# Altium PCB STAC-v1-pcb.PcbDoc
Units mil, origin at the board's own origin, x right, y up, seen from the top; angles counter-clockwise.
Board outline 6000 x 4000 mil, 2 copper layers (Top Layer, Bottom Layer); 170 components, 130 nets, 686 pads, 0 vias.
Unrouted connection lines stored in the file: 502.
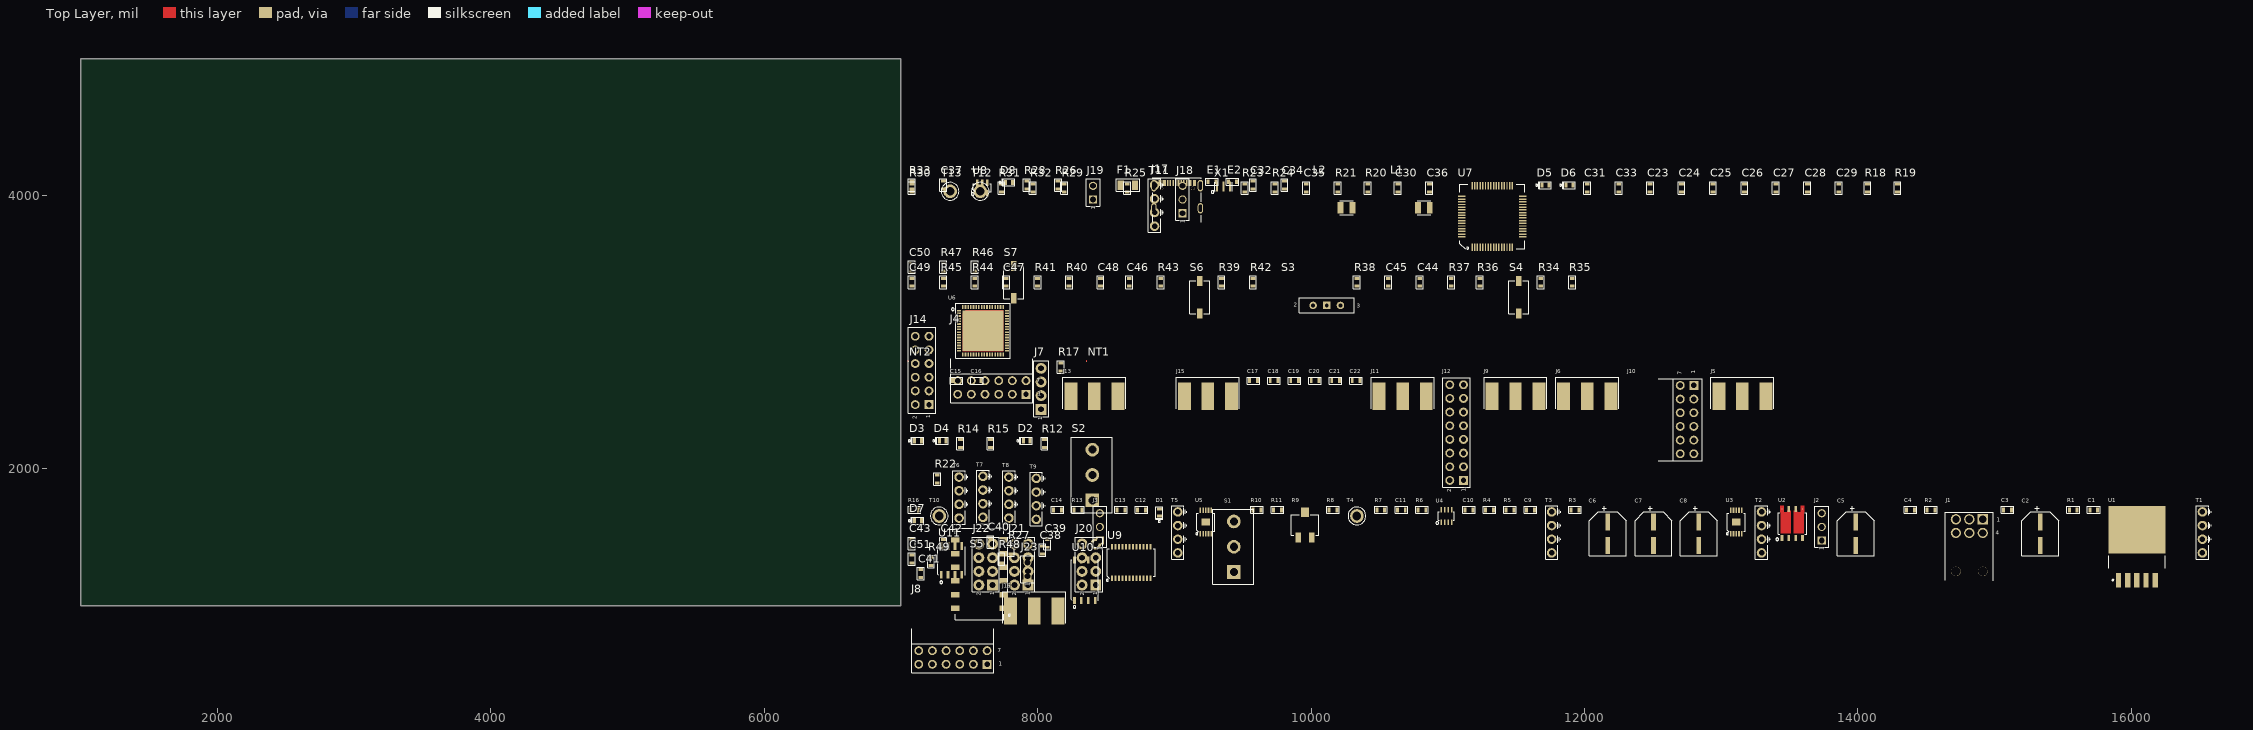
[diagram p0: Top Layer view]
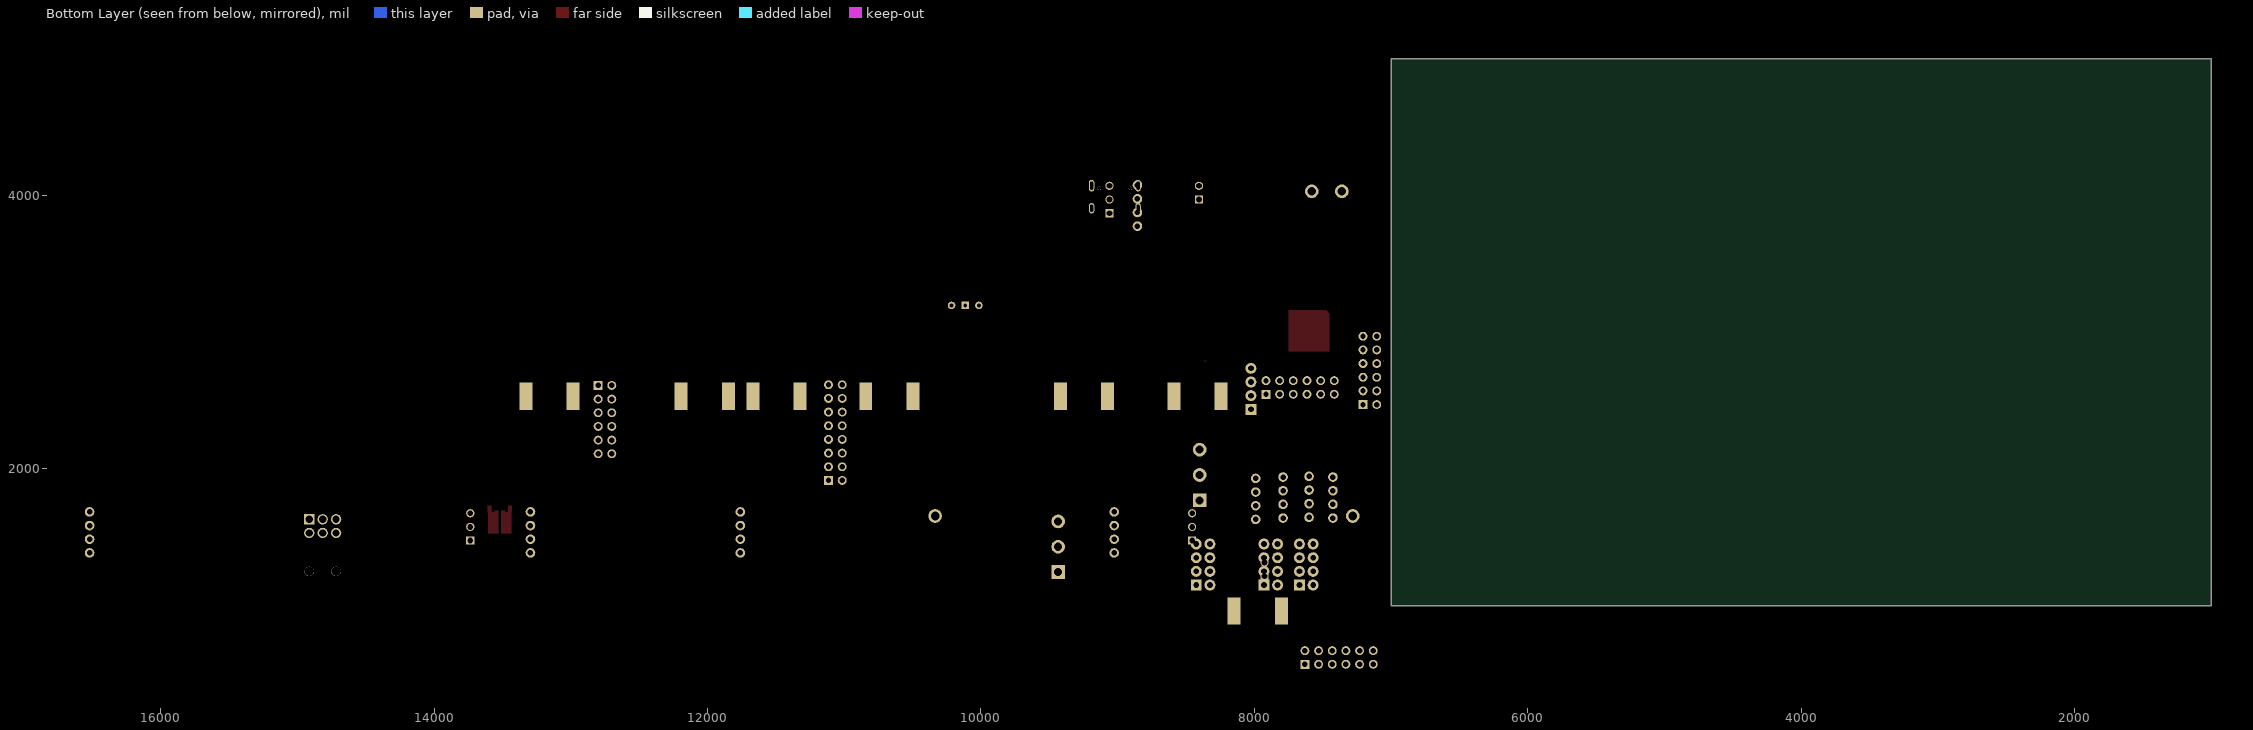
[diagram p1: Bottom Layer view, seen from below]

## Layer stack, top to bottom
Top Solder: solder mask 0.4, Solder Resist, Dk 3.5
Top Layer: signal copper 1.4
Dielectric 1: dielectric 12.6, FR-4, Dk 4.8
Bottom Layer: signal copper 1.4
Bottom Solder: solder mask 0.4, Solder Resist, Dk 3.5

## Board outline
1000,1000 7000,1000 7000,5000 1000,5000

## Design rules (kind name [scope] priority, off if disabled: settings)
Clearance [All] p1: gap=10 ignorepadtopadclearanceinfootprint=FALSE except(0: Arc-Hole Track-Hole SMDPad-Hole THPad-Hole Via-Hole Fill-Hole Poly-Hole Region-Hole Text-Hole)
PolygonConnect [All] p1: connectstyle=Relief reliefconductorwidth=10 reliefentries=4 polygonreliefangle="90 Angle" airgapwidth=10
RoomDefinition USB [InComponentClass('USB')] p1: confinementstyle=ConfineIn formatcopy=TRUE lockcomponents=FALSE outline 7045,2130 11090,2130 11090,4235 7045,4235
RoomDefinition SWITCHES [InComponentClass('SWITCHES')] p2: confinementstyle=ConfineIn formatcopy=TRUE lockcomponents=FALSE outline 7045,1060 8560,1060 8560,4235 7045,4235
RoomDefinition STAC_Test_Board_v1 [InComponentClass('STAC_Test_Board_v1')] p3: confinementstyle=ConfineIn formatcopy=TRUE lockcomponents=FALSE outline 7045,2130 7990,2130 7990,3145 7045,3145
RoomDefinition STAC_Power [InComponentClass('STAC_Power')] p4: confinementstyle=ConfineIn formatcopy=TRUE lockcomponents=FALSE outline 7045,1665 8560,1665 8560,2345 7045,2345
RoomDefinition QSPI [InComponentClass('QSPI')] p5: confinementstyle=ConfineIn formatcopy=TRUE lockcomponents=FALSE outline 7045,1060 8490,1060 8490,4235 7045,4235
RoutingVias [All] p1: holewidth=28 width=50 viastyle="Through Hole" minholewidth=28 minwidth=50 maxholewidth=28 maxwidth=50
SolderMaskExpansion [All] p1: expansion=4 istentingtop=FALSE
Width [All] p1: maxlimit=10 minlimit=10 preferedwidth=10
30 further rules are at their usual default settings.

## Classes and differential pairs
component class USB: C23 C24 C25 C26 C27 C28 C29 C30 C31 C32 C33 C34 C35 C36 C37 D5 D6 D7 D8 E1 E2 F1 J17 J18 J19 L1 L2 R18 R19 R20 R21 R22 R23 R24 R25 R26 R27 R28 R29 R30 R31 R32 R33 T11 T12 T13 U7 U8 X1
component class SWITCHES: C44 C45 C46 C47 C48 C49 C50 C51 J23 R34 R35 R36 R37 R38 R39 R40 R41 R42 R43 R44 R45 R46 R47 R48 R49 S4 S5 S6 S7
component class QSPI: C38 C39 C40 C41 C42 C43 J20 J21 J22 U9 U10 U11
net class SE50: clock_clock clock_clock_isolated PLL_CLK_OUT PLL_DIV_OUT PLL_REF_IN SRAM_SAE_CLK
component class STAC_Test_Board_v1: C15 C16 C17 C18 C19 C20 C21 C22 J4 J5 J6 J7 J8 J9 J10 J11 J12 J13 J14 J15 J16 NT1 NT2 R17 U6
component class STAC_Power: C1 C2 C3 C4 C5 C6 C7 C8 C9 C10 C11 C12 C13 C14 D1 D2 D3 D4 J1 J2 J3 R1 R2 R3 R4 R5 R6 R7 R8 R9 R10 R11 R12 R13 R14 R15 R16 S1 S2 S3 T1 T2 T3 T4 T5 T6 T7 T8 T9 T10 U1 U2 U3 U4 U5

## Components (designator, comment, footprint, x,y, rotation, side; value= is the part's Value field where it differs from the comment)
C1 "10uF" 0603 15725,1700 r0 top
C2 "220uF" CAP-SMT-CAN-D 15335,1525 r0 top
C3 "10uF" 0603 15095,1700 r0 top
C4 "0.1uF" 0603 14385,1700 r0 top
C5 "220uF" CAP-SMT-CAN-D 13985,1525 r0 top
C6 "220uF" CAP-SMT-CAN-D 12170,1525 r0 top
C7 "220uF" CAP-SMT-CAN-D 12505,1525 r0 top
C8 "220uF" CAP-SMT-CAN-D 12835,1525 r0 top
C9 "4.7uF" 0603 11605,1700 r0 top
C10 "4.7uF" 0603 11155,1700 r0 top
C11 "0.47uF" 0603 10660,1700 r0 top
C12 "4.7uF" 0603 8760,1700 r0 top
C13 "4.7uF" 0603 8610,1700 r0 top
C14 "0.47uF" 0603 8145,1700 r0 top
C15 "10uF" 0603 7405,2645 r0 top
C16 "10uF" 0603 7555,2645 r0 top
C17 "10uF" 0603 9580,2645 r0 top
C18 "10uF" 0603 9730,2645 r0 top
C19 "10uF" 0603 9880,2645 r0 top
C20 "10uF" 0603 10030,2645 r0 top
C21 "10uF" 0603 10180,2645 r0 top
C22 "10uF" 0603 10330,2645 r0 top
C23 "0.1uF" 0603 12480,4055 r90 top
C24 "0.1uF" 0603 12710,4055 r90 top
C25 "0.1uF" 0603 12940,4055 r90 top
C26 "0.1uF" 0603 13170,4055 r90 top
C27 "0.1uF" 0603 13400,4055 r90 top
C28 "0.1uF" 0603 13630,4055 r90 top
C29 "0.1uF" 0603 13860,4055 r90 top
C30 "10uF" 0603 10635,4055 r90 top
C31 "4.7uF" 0603 12020,4055 r90 top
C32 "0.1uF" 0603 9575,4075 r90 top
C33 "4.7uF" 0603 12250,4055 r90 top
C34 "0.1uF" 0603 9805,4075 r90 top
C35 "10uF" 0603 9965,4055 r90 top
C36 "3.3uF" 0603 10865,4055 r90 top
C37 "10uF" 0603 7310,4075 r90 top
C38 "10uF" 0603 8035,1405 r90 top
C39 "10uF" 0603 8070,1455 r90 top
C40 "10uF" 0603 7655,1465 r90 top
C41 "10uF" 0603 7145,1233.74 r90 top
C42 "10uF" 0603 7310,1455 r90 top
C43 "10uF" 0603 7080,1455 r90 top
C44 "0.1uF" 0603 10795,3365 r90 top
C45 "0.1uF" 0603 10565,3365 r90 top
C46 "0.1uF" 0603 8670,3365 r90 top
C47 "0.1uF" 0603 7770,3365 r90 top
C48 "0.1uF" 0603 8460,3365 r90 top
C49 "0.1uF" 0603 7080,3365 r90 top
C50 "0.1uF" 0603 7080,3475 r90 top
C51 "0.1uF" 0603 7080,1340 r90 top
D1 "SML-LX0603GW-TR (green)" LED-0603 8890,1680 r90 top
D2 "SML-LX0603GW-TR (green)" LED-0603 7920,2205 r0 top
D3 "APT1608LVBC/D (blue)" LED-0603 7125,2205 r0 top
D4 "7017X1 (red)" LED-0603 7305,2205 r0 top
D5 "APT1608LVBC/D (blue)" LED-0603 11715,4075 r0 top
D6 "APT1608LVBC/D (blue)" LED-0603 11890,4075 r0 top
D7 "LTST-C193KRKT-5A (red)" LED-0603 7125,1620 r0 top
D8 "SML-LX0603GW-TR (green)" LED-0603 7790,4095 r0 top
E1 "PGB1010603MR" 0603 9275,4100 r0 top
E2 "PGB1010603MR" 0603 9425,4100 r0 top
F1 "PTSLR12066V150" 1206 8660,4075 r0 top
J1 "1053141106" CON-006-2.50-8.4X12.68/2X3-RA-POST 14815,1630 r0 top
J2 "TSW-103-07-G-S" CON-003-100-300X100/1X3-POST 13735,1475 r90 top
J3 "TSW-103-07-G-S" CON-003-100-300X100/1X3-POST 8455,1475 r90 top
J4 "TSW-106-08-L-D-RA" CON-012-100-600X200/2X6-POST-RA_ALT 7665,2595 r0 top
J5 "142-0701-801" CON-001-9.5X7.9/SMA-EDGE 13155,2430 r0 top
J6 "142-0701-801" CON-001-9.5X7.9/SMA-EDGE 12020,2430 r0 top
J7 "TSW-104-07-G-S" CON-004-100-400X100/1X4-POST 8025,2435 r90 top
J8 "TSW-106-08-L-D-RA" CON-012-100-600X200/2X6-POST-RA_ALT 7380,620 r0 top
J9 "142-0701-801" CON-001-9.5X7.9/SMA-EDGE 11495,2430 r0 top
J10 "TSW-106-08-L-D-RA" CON-012-100-600X200/2X6-POST-RA_ALT 12750,2360 r90 top
J11 "142-0701-801" CON-001-9.5X7.9/SMA-EDGE 10670,2430 r0 top
J12 "TSW-108-07-L-D" CON-016-100-800X200/2X8-POST 11065,2265 r90 top
J13 "142-0701-801" CON-001-9.5X7.9/SMA-EDGE 8415,2430 r0 top
J14 "SSW-106-01-G-D" CON-012-100-600X200/2X6-POST 7155,2720 r90 top
J15 "142-0701-801" CON-001-9.5X7.9/SMA-EDGE 9245,2430 r0 top
J16 "142-0701-801" CON-001-9.5X7.9/SMA-EDGE 7975,860 r0 top
J17 "12402012E212A" CON-012-0.5-8.90X7.4/USB-C 9020.47,3803.58 r0 top
J18 "TSW-103-07-G-S" CON-003-100-300X100/1X3-POST 9060,3870 r90 top
J19 "TSW-102-07-G-S" CON-002-100-200X100/1X2-POST 8405,3970 r90 top
J20 "TSW-104-07-L-D" CON-008-100-400X200/2X4-POST 8425,1150 r90 top
J21 "TSW-104-07-L-D" CON-008-100-400X200/2X4-POST 7930,1150 r90 top
J22 "TSW-104-07-L-D" CON-008-100-400X200/2X4-POST 7670,1150 r90 top
J23 "TSW-102-07-G-S" CON-002-100-200X100/1X2-POST 7925,1215 r90 top
L1 "DFE252012F-1R0M=P2 (1uH)" 1008 10825,3910 r0 top
L2 "DFE252012F-1R0M=P2 (1uH)" 1008 10260,3910 r0 top
NT1 "DISCRETE_NetTie" NET_TIE 8360,2790 r90 top net-tie
NT2 "DISCRETE_NetTie" NET_TIE 7055,2790 r90 top net-tie
R1 "909" 0603 15575,1700 r0 top
R2 "100K" 0603 14535,1700 r0 top
R3 "200K" 0603 11930,1700 r0 top
R4 "510K" 0603 11305,1700 r0 top
R5 "2.7M" 0603 11455,1700 r0 top
R6 "15K" 0603 10810,1700 r0 top
R7 "82.5K" 0603 10510,1700 r0 top
R8 "301" 0603 10160,1700 r0 top
R9 "3214X-1-502E (5K)" VR-03-100-4.8X5.7/TOP 9955,1590 r0 top
R10 "215K" 0603 9605,1700 r0 top
R11 "301" 0603 9755,1700 r0 top
R12 "250" 0603 8050,2185 r90 top
R13 "33.2K" 0603 8295,1700 r0 top
R14 "330" 0603 7435,2185 r90 top
R15 "75" 0603 7655,2185 r90 top
R16 "301" 0603 7100,1700 r0 top
R17 "0" 0603 8170,2745 r90 top
R18 "330" 0603 14070,4055 r90 top
R19 "330" 0603 14290,4055 r90 top
R20 "10" 0603 10415,4055 r90 top
R21 "10" 0603 10195,4055 r90 top
R22 "330" 0603 7265,1926.26 r90 top
R23 "5.1K" 0603 9515,4055 r90 top
R24 "5.1K" 0603 9735,4055 r90 top
R25 "0 DNP" 0603 8655,4055 r90 top
R26 "4.7K" 0603 8150,4075 r90 top
R27 "10K" 0603 7805,1405 r90 top
R28 "250" 0603 7920,4075 r90 top
R29 "10K" 0603 8195,4055 r90 top
R30 "12K 0.5%" 0603 7080,4055 r90 top
R31 "10K" 0603 7735,4055 r90 top
R32 "10K" 0603 7965,4055 r90 top
R33 "2.2K" 0603 7080,4075 r90 top
R34 "5.1K" 0603 11680,3365 r90 top
R35 "5.1K" 0603 11910,3365 r90 top
R36 "5.1K" 0603 11235,3365 r90 top
R37 "5.1K" 0603 11025,3365 r90 top
R38 "5.1K" 0603 10335,3365 r90 top
R39 "5.1K" 0603 9345,3365 r90 top
R40 "5.1K" 0603 8230,3365 r90 top
R41 "5.1K" 0603 8000,3365 r90 top
R42 "5.1K" 0603 9575,3365 r90 top
R43 "5.1K" 0603 8900,3365 r90 top
R44 "5.1K" 0603 7540,3365 r90 top
R45 "5.1K" 0603 7310,3365 r90 top
R46 "5.1K" 0603 7540,3475 r90 top
R47 "5.1K" 0603 7310,3475 r90 top
R48 "5.1K" 0603 7735,1340 r90 top
R49 "5.1K" 0603 7220,1321.26 r90 top
S1 "CS12ANW03" SW-003-4.7-14.0X7.0/SPDT-CS 9435,1430 r90 top
S2 "CS12ANW03" SW-003-4.7-14.0X7.0/SPDT-CS 8400,1955 r90 top
S3 "450301014042" SW-003-100-10.0X2.5/SPDT-WS-SLTV 10015,3195 r0 top
S4 "PTS636 SK25J SMTR LFS" SW-02-6.7X3.7 11520,3255 r90 top
S5 "418121270806" GW-12-100-390 7575,1230 r90 top
S6 "PTS636 SK25J SMTR LFS" SW-02-6.7X3.7 9185,3255 r90 top
S7 "PTS636 SK25J SMTR LFS" SW-02-6.7X3.7 7825,3365 r90 top
T1 "TEST_PT_4" TP-04-40/ROUND-THT 16520,1535 r90 top
T2 "TEST_PT_4" TP-04-40/ROUND-THT 13295,1535 r90 top
T3 "TEST_PT_4" TP-04-40/ROUND-THT 11760,1535 r90 top
T4 "5008 (orange)" TP-63/ROUND-THT 10335,1655 r0 top
T5 "TEST_PT_4" TP-04-40/ROUND-THT 9025,1535 r90 top
T6 "TEST_PT_4" TP-04-40/ROUND-THT 7425,1790 r90 top
T7 "TEST_PT_4" TP-04-40/ROUND-THT 7600,1795 r90 top
T8 "TEST_PT_4" TP-04-40/ROUND-THT 7790,1790 r90 top
T9 "TEST_PT_4" TP-04-40/ROUND-THT 7990,1780 r90 top
T10 "5006 (black)" TP-63/ROUND-THT 7280,1655 r0 top
T11 "TEST_PT_4" TP-04-40/ROUND-THT 8855,3925 r90 top
T12 "5009 (yellow)" TP-63/ROUND-THT 7580,4030 r0 top
T13 "5009 (yellow)" TP-63/ROUND-THT 7360,4030 r0 top
U1 "LT3083EQ#PBF" DDPAK-5 16040,1430 r0 top
U2 "BUK9K12-60EX" LCCT-08-1.27-5.3X6.2/DUAL-FET 13520,1600 r0 top
U3 "LT3042" GW-10-.5-4.9/THM 13110,1610 r0 top
U4 "LTC4365" GW-08-.65-2.9 10990,1655 r0 top
U5 "LT3042" GW-10-.5-4.9/THM 9230,1610 r0 top
U6 "TESTCHIP_STAC_v1" QFN-64-.5-9.0X9.0/THERM-7.6 7600,3010 r270 top
U7 "FT2232HL" QFP-64-.5-12.0X12.0 11325,3845 r0 top
U8 "93LC56BT-I/OT" SOT-23-6 7595,4055 r0 top
U9 "TS3A27518EPWR" GW-24-.65-6.4 8685,1315 r0 top
U10 "IS25LP128-JBLE" GW-08-1.27-5.2X8.0 8345,1185 r0 top
U11 "APS6404L-3SQR-SN" GW-08-1.27-5.0X6.0 7370,1330 r0 top
X1 "CSTNE12M0GH5L000R0" XTAL-03-1.2-3.2X1.3/MURATA 9360,4065 r0 top

## Footprints (in the part's own frame and the unit in brackets; to place one, negate y for a bottom-side part, rotate by r counter-clockwise, add the part's x,y. Pads: shape width x height; smd on the part's side, far side on the other; paste and mask are expansions set on the pad)
0603 [mm]
  rect 0.55x0.9 smd mask+0: 1(-0.73,0) 2(0.73,0)
  silkscreen extent -1.17,-0.64 1.17,0.64, body extent -0.76,-0.38 0.76,0.38, height 0.79
1008 [mm]
  rect 1.1x2.1 smd mask+0: 1(-1.1,0) 2(1.1,0)
  silkscreen extent -1.27,-1.27 1.27,1.27, body extent -1.35,-1.1 1.35,1.1, height 1.19
1206 [mm]
  rect 1.2x1.8 smd mask+0: 1(-1.325,0) 2(1.325,0)
  silkscreen extent -2.16,-1.14 2.16,1.14, body extent -1.6,-0.8 1.6,0.8, height 1.93
CAP-SMT-CAN-D [mil]
  rect 33.47x125.99 smd mask+0: 1(0.01,86.62) 2(0.01,-86.61)
  silkscreen extent -135,-160 135,200, body extent -130,-144 130,144, height 234
CON-001-9.5X7.9/SMA-EDGE [mil]
  rect 90x200 smd mask+0: 1(0,100)
  rect 95x200 smd mask+0: 2(-172.5,100) 3(172.5,100)
  rect 95x200 smd far side mask+0: 4(-172.5,100) 5(172.5,100)
  silkscreen extent -230,10 230,240, body extent -188,-382 188,180, height 172
CON-002-100-200X100/1X2-POST [mil] "2 pin"
  rect 60x60 hole 42 mask+0: 1(0,0)
  round 60 hole 42 mask+0: 2(100,0)
  silkscreen extent -50,-50 150,50, body extent -55,-50 150,50, height 330
CON-003-100-300X100/1X3-POST [mil] "3-pin"
  rect 60x60 hole 42 mask+0: 1(0,0)
  round 60 hole 42 mask+0: 2(100,0) 3(200,0)
  silkscreen extent -50,-50 250,50, body extent -55,-50 250,50, height 330
CON-004-100-400X100/1X4-POST [mil]
  rect 80x80 hole 42 mask+0: 1(0.1,0.1)
  round 80 hole 42 mask+0: 2(100.1,0.1) 3(200.1,0.1) 4(300.1,0.1)
  silkscreen extent -55,-55 355,55, body extent -55,-50 350,50, height 330
CON-006-2.50-8.4X12.68/2X3-RA-POST [mm]
  rect 1.905x1.905 hole 1.346 mask+0: 1(2.5,0.02)
  round 1.905 hole 1.346 mask+0: 2(0,0.02) 3(-2.5,0.02) 4(2.5,-2.52) 5(0,-2.52) 6(-2.5,-2.52)
  round 1.778 hole 1.778 mask+0: 7(-2.5,-9.66) 8(2.5,-9.66)
  silkscreen extent -4.44,-11.4 4.44,1.31, body extent -4.22,-14.33 4.22,0.33, height 9.15
CON-008-100-400X200/2X4-POST [mil]
  rect 80x80 hole 42 mask+0: 1(0,0)
  round 80 hole 42 mask+0: 2(0,100) 3(100,0) 4(100,100) 5(200,0) 6(200,100) 7(300,0) 8(300,100)
  silkscreen extent -50,-50 350,150
CON-012-0.5-8.90X7.4/USB-C [mm]
  rect 0.6x1.15 smd mask+0: A1B12(-3.2,7.275) A4B9(-2.4,7.275) B1A12(3.2,7.275) B4A9(2.4,7.275)
  rect 0.3x1.15 smd mask+0: A5(-1.25,7.275) A6(-0.25,7.275) A7(0.25,7.275) A8(1.25,7.275) B5(1.75,7.275) B6(0.75,7.275) B7(-0.75,7.275) B8(-1.75,7.275)
  round 0.65 hole 0.65 unplated mask+0: M1(-2.89,6.283) M2(2.89,6.283)
  oval 1.016x1.904 hole 0.55 slot 1.3 at 90 deg mask+0: SH1(-4.32,2.603) SH4(4.32,2.603)
  oval 1.016x2.158 hole 0.55 slot 1.5 at 90 deg mask+0: SH2(-4.32,6.811) SH3(4.32,6.811)
  silkscreen extent -4.5,0 4.5,8.3, body extent -4.47,0 4.47,7.6, height 3.28
CON-012-100-600X200/2X6-POST [mil]
  rect 64.97x64.97 hole 39.38 mask+0: 1(-250,-50)
  round 65.01 hole 39.38 mask+0: 2(-250,50.01) 3(-150,-50) 4(-150,50.01) 5(-50,-50) 6(-50,50.01) 7(50.01,-50) 8(50.01,50.01) 9(150.01,-50) 10(150.01,50.01) 11(250.01,-50) 12(250.01,50.01)
  silkscreen extent -315,-100 315,100, body extent -310,-98 310,98, height 335
CON-012-100-600X200/2X6-POST-RA_ALT [mil]
  rect 64.97x64.97 hole 39.38 mask+0: 1(250,-50)
  round 65.01 hole 39.38 mask+0: 2(150,-50) 3(50,-50) 4(-50,-50) 5(-150,-50) 6(-250,-50) 7(250,50) 8(150,50) 9(50,50) 10(-50,50) 11(-150,50) 12(-250,50)
  silkscreen extent -300,-110 300,210, body extent -300,-60 300,442, height 220
CON-016-100-800X200/2X8-POST [mil]
  rect 64.97x64.97 hole 39.38 mask+0: 1(-350,-50)
  round 65.01 hole 39.38 mask+0: 2(-350,50.01) 3(-250,-50) 4(-250,50.01) 5(-150,-50) 6(-150,50.01) 7(-50,-50) 8(-50,50.01) 9(50.01,-50) 10(50.01,50.01) 11(150.01,-50) 12(150.01,50.01) 13(250.01,-50) 14(250.01,50.01) 15(350.01,-50) 16(350.01,50.01)
  silkscreen extent -400,-100 400,100, body extent -400,-100 400,100, height 330
DDPAK-5 [mm] "DPAK, 5-Leads, Body 10.22x8.89mm, Pitch 1.702mm, IPC High Density"
  rect 1x2.7 smd mask+0: 1(-3.4,-6.2) 2(-1.7,-6.2) 3(0,-6.2) 4(1.7,-6.2) 5(3.4,-6.2)
  rect 10.6x8.8 smd mask+0: 6(0,3.15)
  silkscreen extent -5.25,-6.32 5.25,-1.65, body extent -4.7,-6.73 4.7,6.54, height 4.83
GW-08-1.27-5.0X6.0 [mm]
  rect 0.5x1.44 smd mask+0: 1(-1.91,-2.68) 2(-0.64,-2.68) 3(0.64,-2.68) 4(1.91,-2.68) 5(1.91,2.68) 6(0.64,2.68) 7(-0.64,2.68) 8(-1.91,2.68)
  silkscreen extent -2.54,-4.32 2.54,2.54, body extent -2.45,-3 2.45,3, height 1.75
GW-08-1.27-5.2X8.0 [mm]
  rect 0.5x1.3 smd mask+0: 1(-1.91,-3.75) 2(-0.64,-3.75) 3(0.64,-3.75) 4(1.91,-3.75) 5(1.91,3.75) 6(0.64,3.75) 7(-0.64,3.75) 8(-1.91,3.75)
  silkscreen extent -2.54,-5.21 2.54,3.81, body extent -2.69,-4.05 2.69,4.05, height 2.16
GW-08-.65-2.9 [mm]
  rect 0.304x1.008 smd paste+0 mask+0: 1(-0.975,-1.146) 2(-0.325,-1.146) 3(0.325,-1.146) 4(0.975,-1.146) 5(0.975,1.146) 6(0.325,1.146) 7(-0.325,1.146) 8(-0.975,1.146)
  silkscreen extent -1.95,-1.55 1.5,0.8
GW-10-.5-4.9/THM [mm]
  rect 0.304x1.008 smd mask+0: 1(-1,-2.196) 2(-0.5,-2.196) 3(0,-2.196) 4(0.5,-2.196) 5(1,-2.196) 6(1,2.196) 7(0.5,2.196) 8(0,2.196) 9(-0.5,2.196) 10(-1,2.196)
  rect 1.55x1.32 smd mask+0: 11(0,0)
  silkscreen extent -1.84,-2.35 1.65,1.65, body extent -1.55,-2.53 1.55,2.53, height 1.09
GW-12-100-390 [mil]
  rect 39.38x63 smd mask+0: 1(-250,-177.16) 2(-150,-177.16) 3(-50,-177.16) 4(50.01,-177.16) 5(150.01,-177.16) 6(250.01,-177.16) 7(250.01,177.17) 8(150.01,177.17) 9(50.01,177.17) 10(-50,177.17) 11(-150,177.17) 12(-250,177.17)
  silkscreen extent -335,-225 335,177, body extent -319,-193 319,193, height 168
GW-24-.65-6.4 [mm]
  rect 0.35x1.01 smd mask+0: 1(-3.58,-2.9) 2(-2.93,-2.9) 3(-2.28,-2.9) 4(-1.63,-2.9) 5(-0.98,-2.9) 6(-0.33,-2.9) 7(0.33,-2.9) 8(0.98,-2.9) 9(1.63,-2.9) 10(2.28,-2.9) 11(2.93,-2.9) 12(3.58,-2.9) 13(3.58,2.9) 14(2.93,2.9) 15(2.28,2.9) 16(1.63,2.9) 17(0.98,2.9) 18(0.33,2.9) 19(-0.33,2.9) 20(-0.98,2.9) 21(-1.63,2.9) 22(-2.28,2.9) 23(-2.93,2.9) 24(-3.58,2.9)
  silkscreen extent -4.63,-3.49 4.44,2.54, body extent -3.9,-3.2 3.9,3.2, height 1.2
LCCT-08-1.27-5.3X6.2/DUAL-FET [mm]
  rect 0.5x1.074 smd mask+0: 1(-1.905,-2.675) 2(-0.635,-2.675) 3(0.635,-2.675) 4(1.905,-2.675) 6(0.635,2.675) 7(-0.635,2.675)
  round 0.127 smd mask+0: 5(1.905,2.675) 8(-1.905,2.675)
  Top Layer region: -2.2,3.3 -2.2,2.1 -2.1,2 -2.1,-1.8 -0.3,-1.8 -0.3,2.4 -0.9,2.4 -0.9,2.1 -1.6,2.1 -1.6,3.3 -2.2,3.3
  Top Layer region: 2.2,3.3 2.2,2.1 2.1,2 2.1,-1.8 0.3,-1.8 0.3,2.4 0.9,2.4 0.9,2.1 1.6,2.1 1.6,3.3 2.2,3.3
  silkscreen extent -3.05,-3.17 2.65,2
LED-0603 [mm]
  rect 0.55x0.95 smd mask+0: 1(-0.625,0) 2(0.625,0)
  silkscreen extent -1.84,-0.64 1.07,0.64, body extent -0.8,-0.4 0.8,0.4, height 0.8
NET_TIE [mil]
  rect 3x3 smd paste+0 mask-1.5: 1(-5,0) 2(5,0)
  Top Layer lines w5.01: -5,0 5,0
QFN-64-.5-9.0X9.0/THERM-7.6 [mm]
  rect 0.3x0.724 smd mask+0: 1(-3.75,-4.437) 2(-3.25,-4.437) 3(-2.75,-4.437) 4(-2.25,-4.437) 5(-1.75,-4.437) 6(-1.25,-4.437) 7(-0.75,-4.437) 8(-0.25,-4.437) 9(0.25,-4.437) 10(0.75,-4.437) 11(1.25,-4.437) 12(1.75,-4.437) 13(2.25,-4.437) 14(2.75,-4.437) 15(3.25,-4.437) 16(3.75,-4.437) 33(3.75,4.437) 34(3.25,4.437) 35(2.75,4.437) 36(2.25,4.437) 37(1.75,4.437) 38(1.25,4.437) 39(0.75,4.437) 40(0.25,4.437) 41(-0.25,4.437) 42(-0.75,4.437) 43(-1.25,4.437) 44(-1.75,4.437) 45(-2.25,4.437) 46(-2.75,4.437) 47(-3.25,4.437) 48(-3.75,4.437)
  rect 0.724x0.3 smd mask+0: 17(4.437,-3.75) 18(4.437,-3.25) 19(4.437,-2.75) 20(4.437,-2.25) 21(4.437,-1.75) 22(4.437,-1.25) 23(4.437,-0.75) 24(4.437,-0.25) 25(4.437,0.25) 26(4.437,0.75) 27(4.437,1.25) 28(4.437,1.75) 29(4.437,2.25) 30(4.437,2.75) 31(4.437,3.25) 32(4.437,3.75) 49(-4.437,3.75) 50(-4.437,3.25) 51(-4.437,2.75) 52(-4.437,2.25) 53(-4.437,1.75) 54(-4.437,1.25) 55(-4.437,0.75) 56(-4.437,0.25) 57(-4.437,-0.25) 58(-4.437,-0.75) 59(-4.437,-1.25) 60(-4.437,-1.75) 61(-4.437,-2.25) 62(-4.437,-2.75) 63(-4.437,-3.25) 64(-4.437,-3.75)
  rect 7.6x7.6 smd mask+0: 65(0,0)
  Top Layer region: -3.8,3.8 -3.8,-3.2 -3.2,-3.8 3.8,-3.8 3.8,3.8 -3.8,3.8
  silkscreen extent -5.08,-5.85 5.08,5.08, body extent -4.5,-4.5 4.5,4.5, height 1.5
QFP-64-.5-12.0X12.0 [mm]
  rect 0.27x1.4 smd mask+0: 1(-3.75,-5.7) 2(-3.25,-5.7) 3(-2.75,-5.7) 4(-2.25,-5.7) 5(-1.75,-5.7) 6(-1.25,-5.7) 7(-0.75,-5.7) 8(-0.25,-5.7) 9(0.25,-5.7) 10(0.75,-5.7) 11(1.25,-5.7) 12(1.75,-5.7) 13(2.25,-5.7) 14(2.75,-5.7) 15(3.25,-5.7) 16(3.75,-5.7) 33(3.75,5.7) 34(3.25,5.7) 35(2.75,5.7) 36(2.25,5.7) 37(1.75,5.7) 38(1.25,5.7) 39(0.75,5.7) 40(0.25,5.7) 41(-0.25,5.7) 42(-0.75,5.7) 43(-1.25,5.7) 44(-1.75,5.7) 45(-2.25,5.7) 46(-2.75,5.7) 47(-3.25,5.7) 48(-3.75,5.7)
  rect 1.4x0.27 smd mask+0: 17(5.7,-3.75) 18(5.7,-3.25) 19(5.7,-2.75) 20(5.7,-2.25) 21(5.7,-1.75) 22(5.7,-1.25) 23(5.7,-0.75) 24(5.7,-0.25) 25(5.7,0.25) 26(5.7,0.75) 27(5.7,1.25) 28(5.7,1.75) 29(5.7,2.25) 30(5.7,2.75) 31(5.7,3.25) 32(5.7,3.75) 49(-5.7,3.75) 50(-5.7,3.25) 51(-5.7,2.75) 52(-5.7,2.25) 53(-5.7,1.75) 54(-5.7,1.25) 55(-5.7,0.75) 56(-5.7,0.25) 57(-5.7,-0.25) 58(-5.7,-0.75) 59(-5.7,-1.25) 60(-5.7,-1.75) 61(-5.7,-2.25) 62(-5.7,-2.75) 63(-5.7,-3.25) 64(-5.7,-3.75)
  silkscreen extent -6,-6.03 6,6, body extent -6,-6 6,6, height 1.61
SOT-23-6 [mil]
  rect 18.9x48.6 smd mask+0: 1(-37.5,-38.5) 2(0.1,-38.5) 3(37.6,-38.5) 4(37.6,38.6) 5(0.1,38.6) 6(-37.5,38.6)
  silkscreen extent -80,-55 65,30
SW-02-6.7X3.7 [mm]
  rect 1.9x1 smd mask+0: 1(-3,0) 2(3,0)
  silkscreen extent -3.05,-1.85 3.05,1.85, body extent -3.36,-1.85 3.36,1.85, height 2.5
SW-003-4.7-14.0X7.0/SPDT-CS [mm]
  rect 2.54x2.54 hole 1.491 mask+0: 1(-4.7,0)
  round 2.54 hole 1.491 mask+0: 2(0,0) 3(4.7,0)
  silkscreen extent -7,-3.68 7,3.94, body extent -7,-3.5 7,3.81, height 11.46
SW-003-100-10.0X2.5/SPDT-WS-SLTV [mil]
  rect 54.97x54.97 hole 27.64 mask+0: 1(100.01,0.01)
  round 55.01 hole 27.64 mask+0: 2(0.01,0.01) 3(200.01,0.01)
  silkscreen extent -100,-55 300,55, body extent -97,-49 297,49, height 252
TP-04-40/ROUND-THT [mil]
  round 70 hole 40 mask+0: 1(-150,0) 2(-50,0) 3(50,0) 4(150,0)
  silkscreen extent -195,-65 195,45
TP-63/ROUND-THT [mil]
  round 100 hole 63 mask+0: 1(0,0)
  silkscreen extent -65,-65 65,65, body extent -62,-62 62,63, height 220
VR-03-100-4.8X5.7/TOP [mm]
  rect 1x1.8 smd mask+0: 1(-1.27,-2.35) 3(1.27,-2.35)
  rect 1.5x1.8 smd mask+0: 2(0,2.35)
  silkscreen extent -2.54,-1.91 2.54,1.91, body extent -2.4,-1.75 2.4,1.75, height 5.1
XTAL-03-1.2-3.2X1.3/MURATA [mm]
  rect 0.4x1.94 smd mask+0: 1(-1.2,0) 2(0,0) 3(1.2,0)
  silkscreen extent -2.29,-1.27 1.65,0.76, body extent -1.6,-0.65 1.6,0.65, height 0.8

## Part data
C1 C3 C4 C9 C10 C11 C12 C13 C14 C15 C16 C17 C18 C19 C20 C21 C22 C23 C24 C25 C26 C27 C28 C29 C30 C31 C32 C33 C34 C35 C36 C37 C38 C39 C40 C41 C42 C43 C44 C45 C46 C47 C48 C49 C50 C51: library part DISCRETE_C, "Capacitor generic"
C2 C5 C6 C7 C8: library part DISCRETE_C_POL, "20% 16V Alum Radial SMD"
D1 D2 D3 D4 D5 D6 D7 D8: library part DISCRETE_LED, "LED generic"
E1 E2: library part DISCRETE_TVS, "TVS ESD protection clamp generic"
F1: library part DISCRETE_F, "Fuse generic"
J1: library part CON_006pin_2x3_alt, "Con 6 pins 2x3"
J2 J3 J18: library part CON_003pin_1x3, "Con 3 pins"
J4 J8 J10 J14: library part CON_012pin_2x6, "Con 12 pins 2x6"
J5 J6 J9 J11 J13 J15 J16: library part CON_RF_SMA, "Con RF SMA"
J7: library part CON_004pin_1x4, "Con 4 pins 1x4"
J12: library part CON_016pin_2x8, "Con 16 pins 2x8"
J17: library part CON_012pin_USB_C_RECP, "Con 12 pin USB C receptacle + 4 shields, and 2 alignment posts"
J19 J23: library part CON_002pin_1x2, "Con 2 pins"
J20 J21 J22: library part CON_008pin_2x4, "Con 8 pins 2x4"
L1 L2: library part DISCRETE_L, "Inductor generic"
NT1 NT2: "Net tie"
R1 R2 R3 R4 R5 R6 R7 R8 R10 R11 R12 R13 R14 R15 R16 R17 R18 R19 R20 R21 R22 R25 R26 R27 R28 R29 R30 R31 R32 R33 R34 R35 R36 R37 R38 R39 R40 R41 R42 R43 R44 R45 R46 R47 R48 R49: library part DISCRETE_R, "Resistor generic"
R9: library part DISCRETE_R_VARIABLE, "Potentiometer"
R23 R24: library part DISCRETE_R, "5.1kohm resistor"
S1 S2: library part SWITCH_SPDT_3pin, "SWITCH SLIDE SPDT"
S3: library part SWITCH_SPDT_3pin_alt, "SWITCH SLIDE SPDT alternative symbol"
S4 S6 S7: library part SWITCH_SPST_2pin, "Switch 2 pins"
S5: library part SWITCH_SPST_x6, "SWITCH DIP SPST x6"
T1 T2 T3 T5 T6 T7 T8 T9 T11: "Test point 4 pads for probing"
T4 T10 T12 T13: library part TEST_PT, "Test point 1 pin"
U1: library part IC_LT3083, "3 A Single Resistor LDO 1.2 to 23 V Vin, Adj Vout"
U2: library part IC_BUK9K12-60EX, "Dual channel NMOS FETs"
U3 U5: library part IC_LT3042, "LT3042 ultralow noise, high PSRR LDO, max current 200mA"
U4: library part IC_LTC4365, "LTC4365 Over/Under Voltage, Reverse Supply Protection Controller"
U6: "TESTCHIP STAC v1"
U7: library part IC_FT2232HL, "USB Hi-Speed to Dual Channel Serial UART/FIFO/JTAG/SPI/I2C IC 64-pin LQFP package"
U8: library part IC_93LC56BT-I/OT, "EEPROM Non-Volatile Memory 2kbit 128x16 2MHz 2.5V-5.5V SOT-23-6"
U9: library part IC_TS3A27518EPWR, "Analog switch SPDT 6 channels bidirectional"
U10: library part IC_IS25LP128, "Flash memory 128Mb with 133MHz QSPI"
U11: library part IC_APS6404L, "PSRAM 64Mb with 84-133MHz QSPI, 1024 byte pages"
X1: library part XTALOSC_CAP, "crystal oscillator with internal loading capacitors, 3 pins (input, GND, output)"

## Nets (pads, with @x,y where several pads share a name; then routed paths per layer and width w, separated by ;. In a path a pad name is that pad's centre, name@x,y a point inside that pad or via, vN(x,y) a via of type N, cw(c..) or ccw(c..) an arc to the next point about the centre after c; other vN are vias at no path point)
5V: C9.1 C12.1 J2.3 J3.3 J18.2 R12.1 U3.1 U3.2 U3.6 U5.1 U5.2 U5.6
5V_LED: D2.2 R12.2
BCBUS7: J19.1 U7.59
BCBUS7_DIVIDED: J19.2 R26.2 R27.1
clksel_0: C45.1 J12.3 R37.2 U6.28
clksel_0_bounce: R35.2 R37.1 S5.12
clksel_1: C46.1 J12.5 R39.2 U6.41
clksel_1_bounce: R38.2 R39.1 S5.11
clock_clock: J5.1 R17.1 U6.22
clock_clock_isolated: J4.7 R17.2
custom_boot: C47.1 J12.11 R41.2 U6.51
custom_boot_bounce: R40.2 R41.1 S5.10
EECLK: R32.2 U7.62 U8.4
EECS: R29.2 U7.63 U8.5
EEDATA: R33.2 U7.61 U8.3
EEDATAOUT: R31.2 R33.1 U8.1
ENABLE_1V8: J2.2 U3.3
ENABLE_VDDIO: J3.2 U5.3
FAULT_N: T7.1 U4.6
FTDI_REF: R30.1 U7.6
FTDI_RESETN: C51.1 J12.1 R49.2 U7.14
FTDI_RESETN_BOUNCE: R48.2 R49.1 S5.7 S7.1
FTDI_VPHY: C31.1 C32.1 L2.1 U7.4
FTDI_VPLL: C33.1 C34.1 L1.1 U7.9
GATE: U2.2 U2.4 U4.8
GND: C1.2 C2.2 C3.2 C4.2 C5.2 C6.2 C7.2 C8.2 C9.2 C10.2 C11.2 C12.2 C13.2 C14.2 C15.2 C16.2 C17.2 C18.2 C19.2 C20.2 C21.2 C22.2 C23.2 C24.2 C25.2 C26.2 C27.2 C28.2 C29.2 C30.1 C31.2 C32.2 C33.2 C34.2 C35.2 C36.2 C37.2 C38.2 C39.2 C40.2 C41.2 C42.2 C43.2 C44.2 C45.2 C46.2 C47.2 C48.2 C49.2 C50.2 C51.2 D1.1 D2.1 D3.1 D4.1 D8.1 E1.2 E2.2 J1.4 J1.5 J1.6 J2.1 J3.1 J4.5 J4.11 J5.2 J5.3 J5.4 J5.5 J6.2 J6.3 J6.4 J6.5 J7.4 J8.5 J8.11 J9.2 J9.3 J9.4 J9.5 J10.5 J10.11 J11.2 J11.3 J11.4 J11.5 J12.2 J12.4 J12.6 J12.8 J12.10 J12.12 J12.14 J12.16 J13.2 J13.3 J13.4 J13.5 J14.9 J14.10 J15.2 J15.3 J15.4 J15.5 J16.2 J16.3 J16.4 J16.5 J17.A1B12 J17.B1A12 J20.7 J21.7 J22.7 NT1.2 R1.2 R2.2 R3.2 R8.2 R9.2 R10.2 R13.2 R16.2 R23.2 R24.2 R25.2 R27.2 R30.2 S3.2 S4.2 S5.1 S5.2 S5.3 S5.4 S5.5 S5.6 S6.2 S7.2 T1.2 T1.3 T1.4 T2.2 T2.3 T2.4 T3.2 T3.3 T3.4 T5.2 T5.3 T5.4 T6.2 T6.3 T6.4 T7.2 T7.3 T7.4 T8.2 T8.3 T8.4 T9.2 T9.3 T9.4 T10.1 T11.2 T11.3 T11.4 U3.8 U3.11 U4.4 U5.8 U5.11 U6.1 U6.10 U6.20 U6.23 U6.29 U6.38 U6.39 U6.52 U6.56 U6.65 U7.1 U7.5 U7.10 U7.11 U7.13 U7.15 U7.25 U7.35 U7.47 U7.51 U8.2 U9.5 U10.4 U11.4 X1.2
JTAG_LED: D7.1 U7.29
JTAG_LED_ANODE: D7.2 R22.2
JTAG_SRST: J14.6 J23.2 U7.27
JTAG_TCK: J14.5 U6.24 U7.16
JTAG_TDI: J14.2 U6.26 U7.17
JTAG_TDO: J14.1 U6.27 U7.18
JTAG_TMS: J14.4 U6.25 U7.19
OSCI: U7.2 X1.1
OSCO: U7.3 X1.3
OV: R7.2 R10.1 U4.3
PLL_ARSTB: C48.1 J8.2 J12.9 R43.2 U6.55
PLL_ARSTB_BOUNCE: R42.2 R43.1 S6.1
PLL_CLK_OUT: J13.1 U6.48
PLL_DIV_OUT: J9.1 U6.46
PLL_REF_IN: J11.1 U6.50
PLL_SCAN_CLK: J8.3 U6.45
PLL_SCAN_EN: J8.4 U6.43
PLL_SCAN_IN: J8.7 U6.53
PLL_SCAN_OUT: J8.8 U6.54
PLL_SCAN_RSTN: J8.9 U6.44
PLL_SEL: J8.10 U6.42
PROT6V_INT: U2.1 U2.3
PWRENB: T12.1 U7.60
qspi_sel: C49.1 J12.13 R45.2 U9.14 U9.24
qspi_sel_bounce: R44.2 R45.1 S5.9
REG5V: C3.1 J18.3 R1.1 T1.1 U1.1 U1.3 U1.6
resetn: C44.1 J12.7 J23.1 R36.2 U6.21
resetn_bounce: R34.2 R36.1 S4.1
RXLED: D5.1 U7.54
SENSE_N_GND: J7.3 NT1.1
SENSE_P_VDDD1V8: J7.2 NT2.1
serial_tl_bits_in_bits: J4.4 U6.14
serial_tl_bits_in_ready: J4.3 U6.13
serial_tl_bits_in_valid: J4.2 U6.16
serial_tl_bits_out_bits: J4.10 U6.15
serial_tl_bits_out_ready: J4.9 U6.11
serial_tl_bits_out_valid: J4.8 U6.12
serial_tl_clock: J4.1 U6.31
SET_C: C11.1 R6.1 T4.1 U3.7
SET_E: C14.1 R13.1 U5.7
SET_Z: C4.1 R2.1 U1.2
SHDN_N: R4.2 S3.1 T6.1 U4.5
spi1_cs: J20.1 U9.22 U10.1
spi1_io0: J20.8 U9.2 U10.5
spi1_io1: J20.3 U9.1 U10.2
spi1_io2: J20.5 U9.23 U10.3
spi1_io3: J20.4 U9.21 U10.7
spi1_sck: J20.6 U9.19 U10.6
spi2_cs: J21.1 U9.16 U11.1
spi2_io0: J21.8 U9.11 U11.5
spi2_io1: J21.3 U9.13 U11.2
spi2_io2: J21.5 U9.15 U11.3
spi2_io3: J21.4 U9.17 U11.7
spi2_sck: J21.6 U9.18 U11.6
spi_0_cs_0: J22.1 U6.33 U9.12
spi_0_dq_0: J22.8 U6.37 U9.4
spi_0_dq_1: J22.3 U6.36 U9.6
spi_0_dq_2: J22.5 U6.35 U9.7
spi_0_dq_3: J22.4 U6.34 U9.9
spi_0_sck: J22.6 U6.32 U9.10
spi_mux_enb: C50.1 J12.15 R47.2 U9.20
spi_mux_enb_bounce: R46.2 R47.1 S5.8
SRAM_BIST_DONE: J10.10 U6.5
SRAM_BIST_EN: J10.3 U6.58
SRAM_BIST_START: J10.1 U6.61
SRAM_EN: J10.2 U6.59
SRAM_EXT_EN: J10.4 U6.57
SRAM_SAE_CLK: J6.1 U6.62
SRAM_SCAN_EN: J10.9 U6.4
SRAM_SCAN_IN: J10.7 U6.2
SRAM_SCAN_MODE: J8.1 U6.60
SRAM_SCAN_OUT: J10.8 U6.3
SUSPENDB: T13.1 U7.36
TXLED: D6.1 U7.55
uart_0_rxd: J14.8 U6.8 U7.38
uart_0_txd: J14.7 U6.7 U7.39
UART_RXLED_ANODE: D5.2 R18.2
UART_TXLED_ANODE: D6.2 R19.2
USB_CC1: J17.A5 R24.1
USB_CC2: J17.B5 R23.1
USB_DM_PIN: E2.1 J17.A7 J17.B7 R20.1
USB_DP_PIN: E1.1 J17.A6 J17.B6 R21.1
USB_FUSED_LED: D8.2 R28.2
USB_SHIELD: J17.SH1 J17.SH2 J17.SH3 J17.SH4 R25.1
USB_VBUS_FUSED: F1.2 J18.1 R26.1 R28.1
USB_VBUS_UNFUSED: C30.2 C35.1 F1.1 J17.A4B9 J17.B4A9 T11.1
USBDM: R20.2 U7.7
USBDP: R21.2 U7.8
UV: R5.2 R7.1 U4.2
VDDD1V8: C17.1 C18.1 C19.1 C20.1 C21.1 C22.1 J15.1 NT2.2 R15.1 S1.2 T8.1 U6.9 U6.18 U6.30 U6.40 U6.47 U6.49 U6.63
VDDD1V8_LED: D4.2 R15.2
VDDD_ILIM: R8.1 U3.5
VDDD_TUNE: R6.2 R9.3
VDDDEXT1V8: C5.1 J1.3 J7.1 S1.1
VDDDREG1V8: C10.1 S1.3 T3.1 U3.9 U3.10
VDDIO3V3: C15.1 C16.1 C26.1 C27.1 C28.1 C29.1 C37.1 C38.1 C39.1 C40.1 C41.1 C42.1 C43.1 J16.1 J20.2 J21.2 J22.2 L1.2 L2.2 R14.1 R18.1 R19.1 R22.1 R29.1 R31.1 R32.1 R34.1 R35.1 R38.1 R40.1 R42.1 R44.1 R46.1 R48.1 S2.2 T9.1 U6.17 U6.64 U7.20 U7.31 U7.42 U7.50 U7.56 U8.6 U9.8 U10.8 U11.8
VDDIO3V3_LED: D3.2 R14.2
VDDIO_ILIM: R16.1 U5.5
VDDIOEXT3V3: C2.1 J1.2 S2.1
VDDIOREG3V3: C13.1 S2.3 T5.1 U5.9 U5.10
VREGOUT: C23.1 C24.1 C25.1 C36.1 U7.49
VSUPPLYIN6V: C6.1 J1.1 R3.1 R4.1 R5.1 U2.7 U2.8 U4.1
VSUPPLYPROT6V: C1.1 C7.1 C8.1 R11.1 T2.1 U1.4 U1.5 U2.5 U2.6 U4.7
VSUPPLYPROT6V_LED: D1.2 R11.2
pads on no net: J1.7 J1.8 J4.6 J4.12 J8.6 J8.12 J10.6 J10.12 J14.3 J14.11 J14.12 J17.A8 J17.B8 J17.M1 J17.M2 R9.1 S3.3 U3.4 U5.4 U6.6 U6.19 U7.12 U7.21 U7.22 U7.23 U7.24 U7.26 U7.28 U7.30 U7.32 U7.33 U7.34 U7.37 U7.40 U7.41 U7.43 U7.44 U7.45 U7.46 U7.48 U7.52 U7.53 U7.57 U7.58 U7.64 U9.3

## Text inside footprints (layer, text, board x,y; h text height)
J1: Top Overlay "4" at 15009,1519 h30; Top Overlay "1" at 15014,1614 h30
J2: Top Overlay "1" at 13750,1403 h30 r90
J3: Top Overlay "1" at 8470,1403 h30 r90
J4: Top Overlay "7" at 7994,2634 h30; Top Overlay "1" at 7999,2534 h30
J7: Top Overlay "1" at 8035,2355 h30 r90
J8: Top Overlay "7" at 7709,659 h30; Top Overlay "1" at 7714,559 h30
J10: Top Overlay "7" at 12711,2689 h30 r90; Top Overlay "1" at 12811,2694 h30 r90
J12: Top Overlay "2" at 11026,1829 h30 r90; Top Overlay "1" at 11131,1834 h30 r90
J14: Top Overlay "2" at 7116,2364 h30 r90; Top Overlay "1" at 7216,2369 h30 r90
J18: Top Overlay "1" at 9075,3798 h30 r90
J19: Top Overlay "1" at 8421,3896 h30 r89.16
J20: Top Overlay "2" at 8340,1070 h30 r90; Top Overlay "1" at 8437,1075 h30 r90
J21: Top Overlay "2" at 7845,1070 h30 r90; Top Overlay "1" at 7942,1075 h30 r90
J22: Top Overlay "2" at 7585,1070 h30 r90; Top Overlay "1" at 7682,1075 h30 r90
J23: Top Overlay "1" at 7941,1141 h30 r89.16
S3: Top Overlay "3" at 10335,3180 h30; Top Overlay "2" at 9875,3185 h30